# Altium PCB VTG-Ctrl.PcbDoc (part 1 of 2)
Units mm, origin at the board's own origin, x right, y up, seen from the top; angles counter-clockwise.
Board outline 101 x 82 mm, 12 copper layers (Top, Layer 1, Layer 2, Layer 3, Layer 4, Layer 5, Layer 6, Layer 7, Layer 8, Layer 9, Layer 10, Bottom), stack 1.92 mm thick; 171 components, 102 nets, 650 pads, 12 vias.
Unrouted connection lines stored in the file: 291.
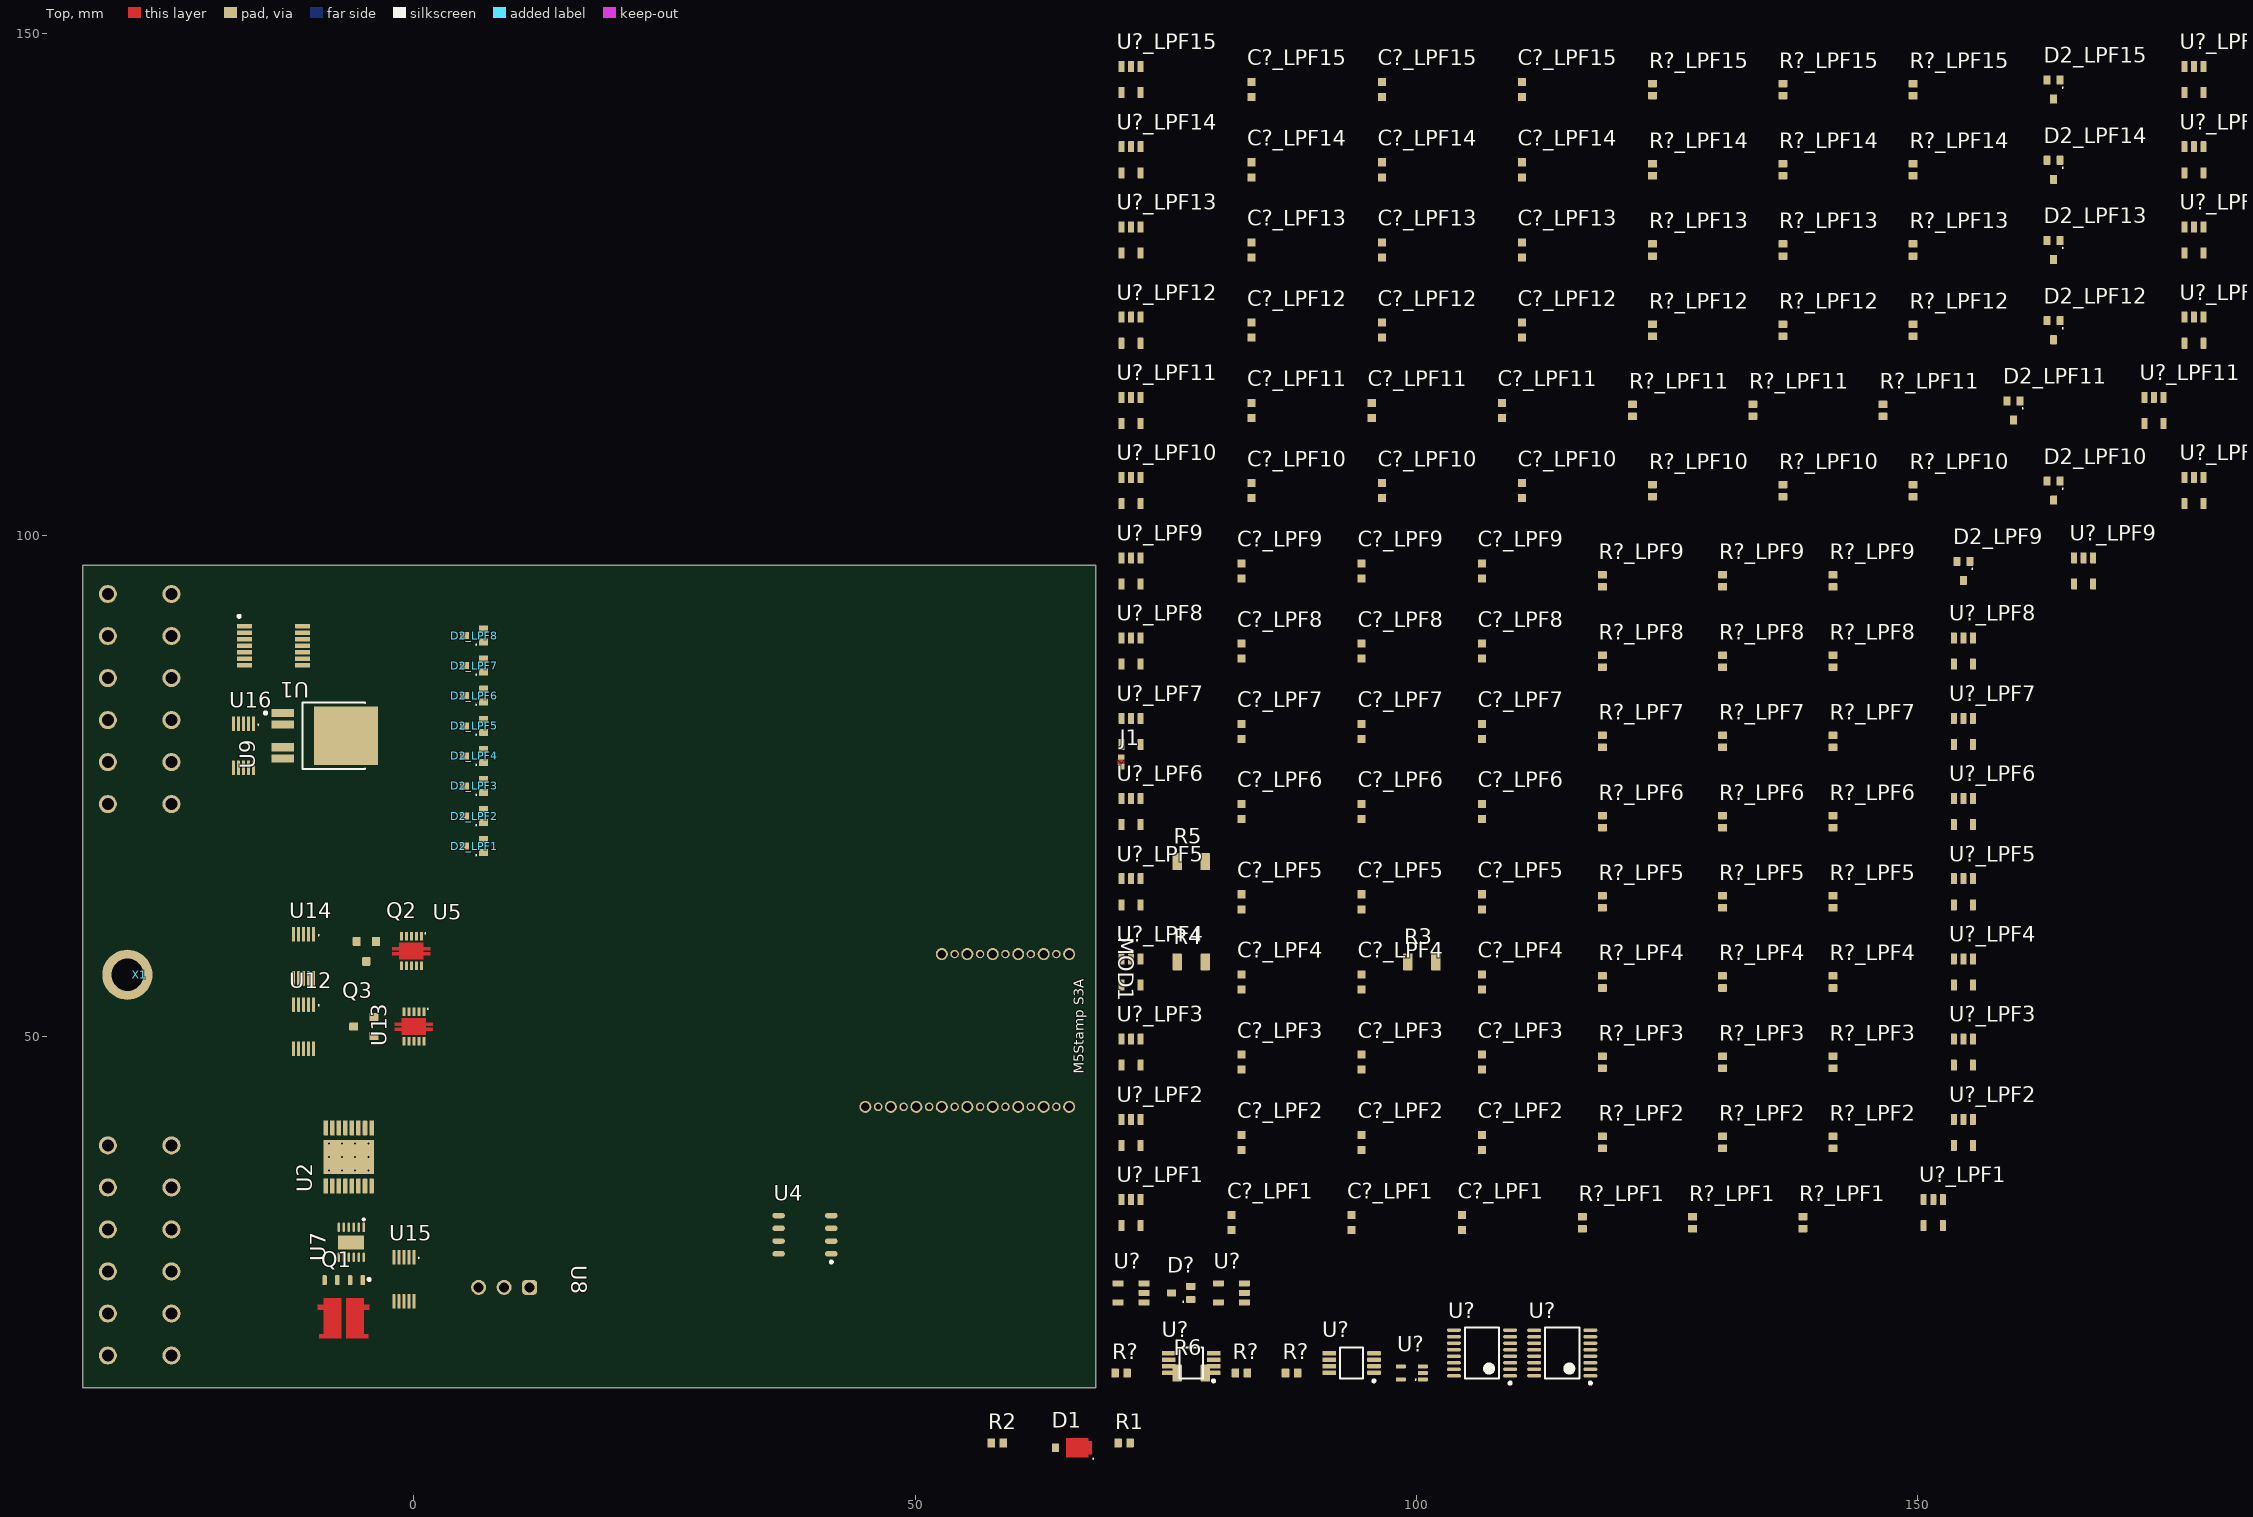
[diagram p0: Top view]
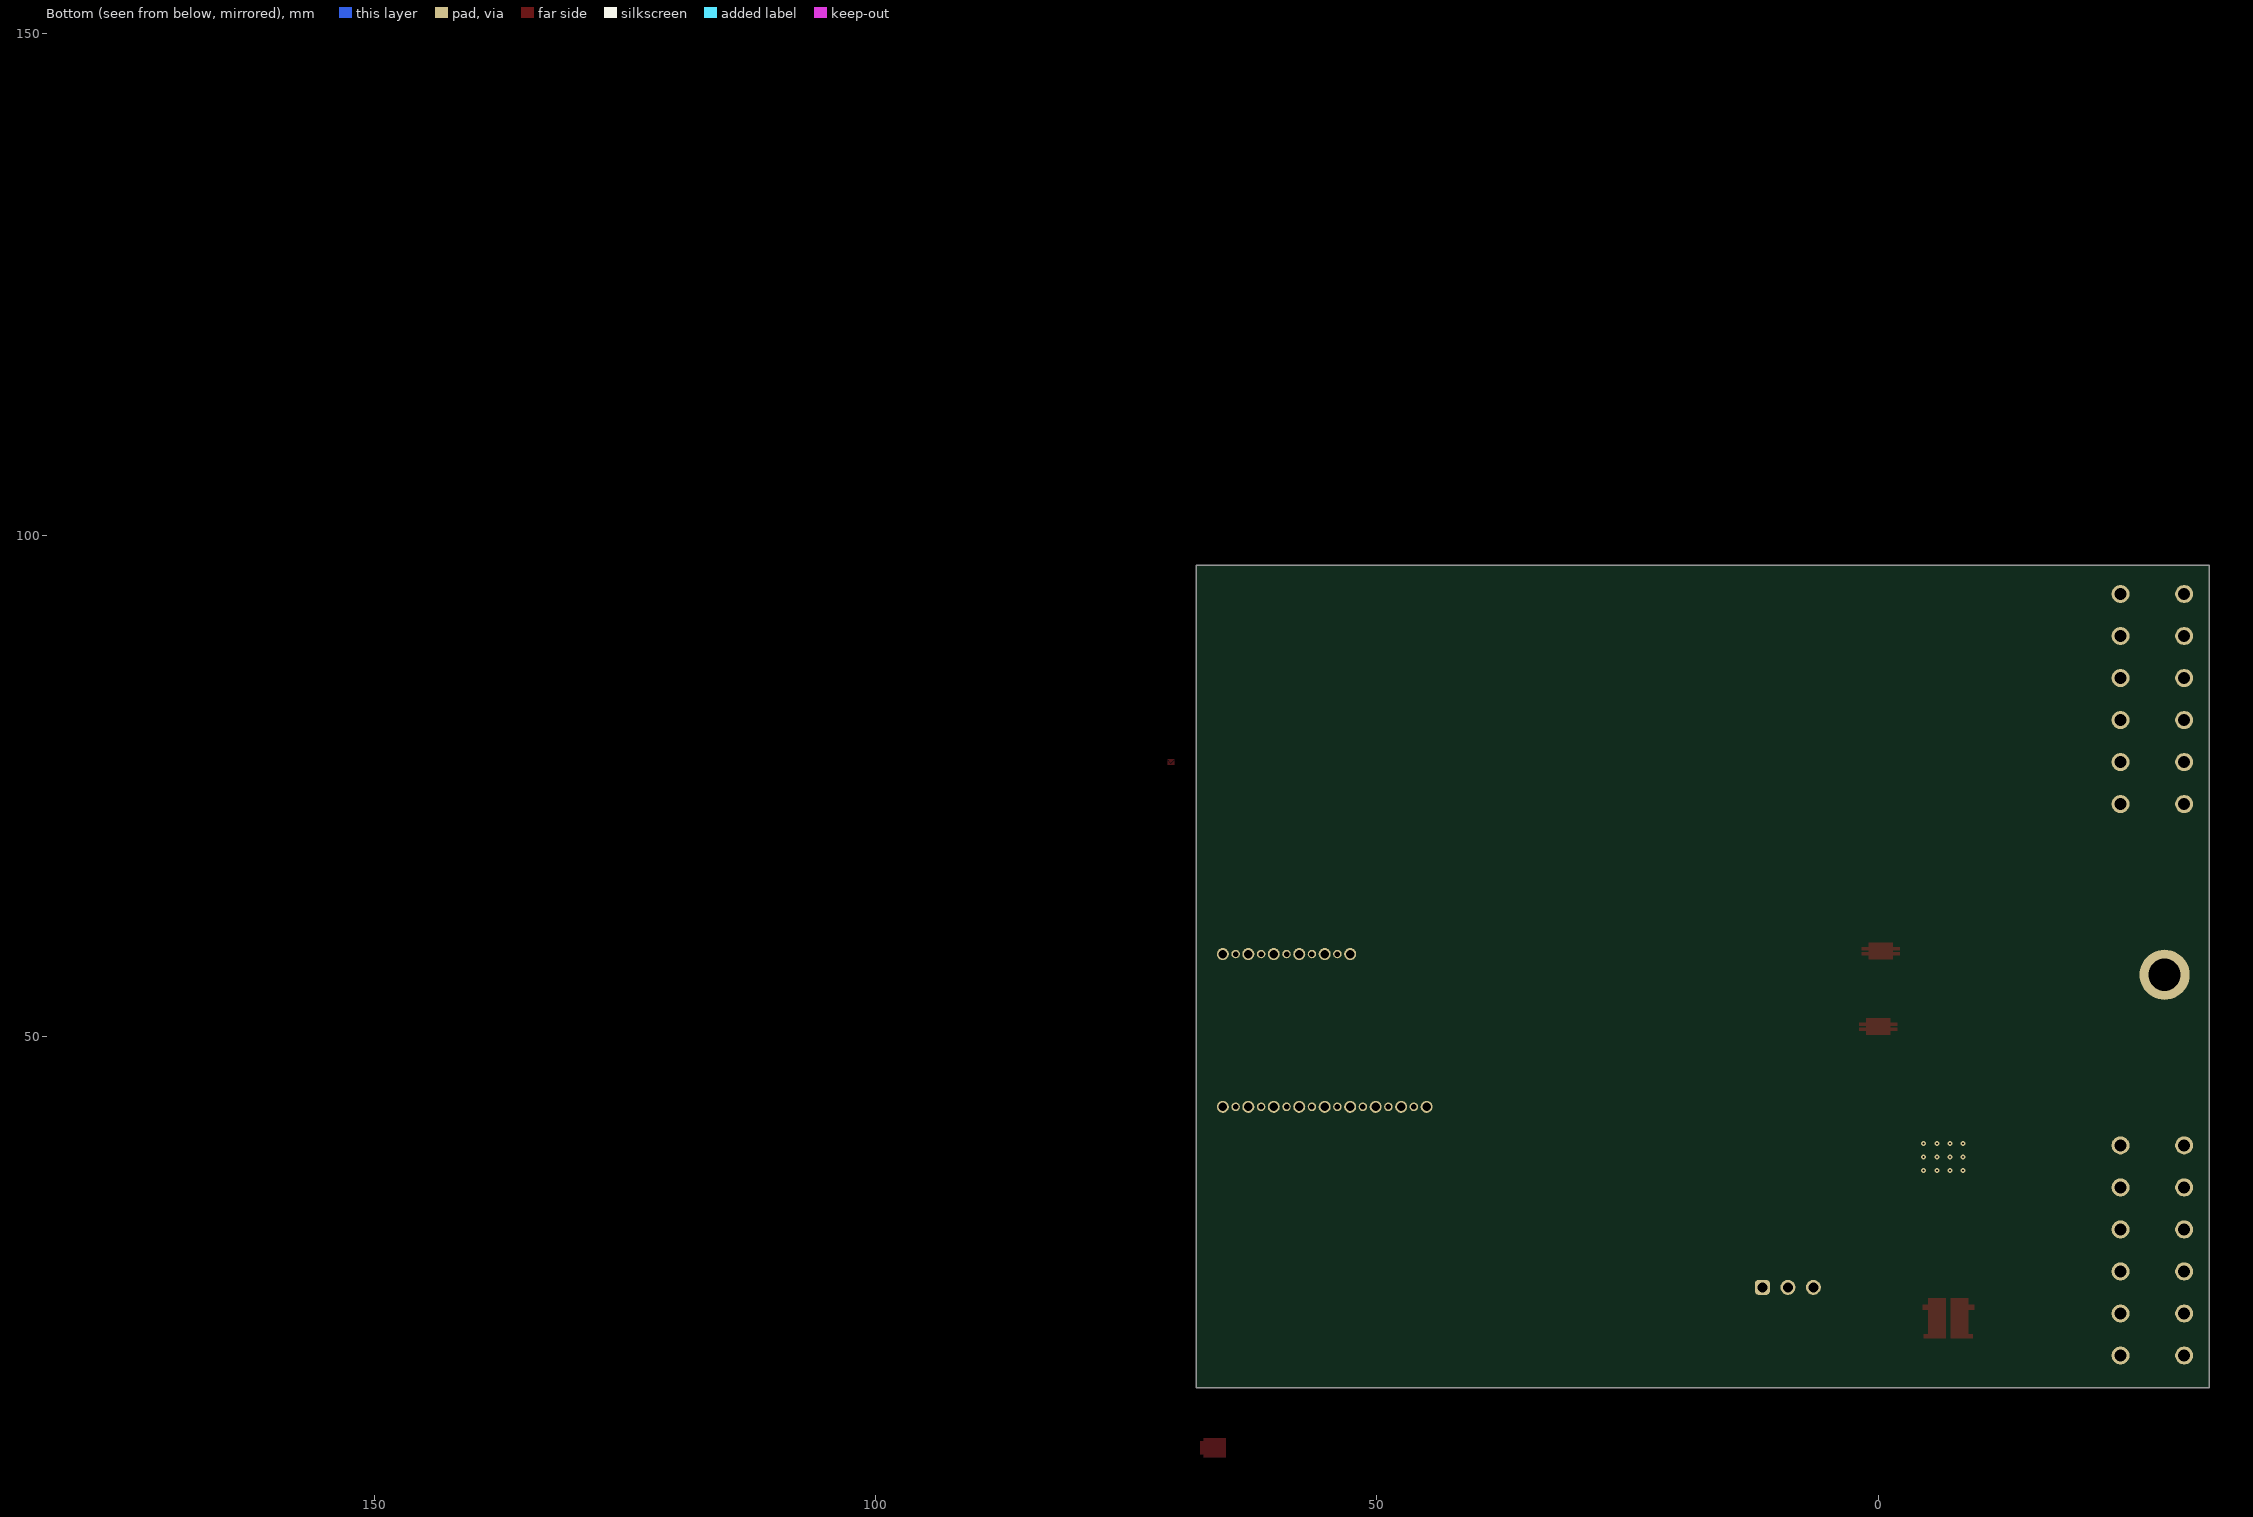
[diagram p1: Bottom view, seen from below]

## Layer stack, top to bottom
Top Solder: solder mask 0.015, WE-SM-0001, Dk 3.5
Top: signal copper 0.035
Dielectric 1: prepreg 0.125, WE-PP-0035, Dk 3.7
Layer 1: signal copper 0.035
Dielectric 2: core 0.15, WE-CO-0043, Dk 4.3
Layer 2: signal copper 0.035
Dielectric 3: prepreg 0.125, WE-PP-0035, Dk 3.7
Layer 3: signal copper 0.035
Dielectric 4: core 0.15, WE-CO-0043, Dk 4.3
Layer 4: signal copper 0.035
Dielectric 5: prepreg 0.125, WE-PP-0035, Dk 3.7
Layer 5: signal copper 0.035
Dielectric 6: core 0.15, WE-CO-0043, Dk 4.3
Layer 6: signal copper 0.035
Dielectric 7: prepreg 0.125, WE-PP-0035, Dk 3.7
Layer 7: signal copper 0.035
Dielectric 8: core 0.15, WE-CO-0043, Dk 4.3
Layer 8: signal copper 0.035
Dielectric 10: prepreg 0.125, WE-PP-0035, Dk 3.7
Layer 9: signal copper 0.035
Dielectric 9: core 0.15, WE-CO-0043, Dk 4.3
Layer 10: signal copper 0.035
Dielectric 11: prepreg 0.125, WE-PP-0035, Dk 3.7
Bottom: signal copper 0.035
Bottom Solder: solder mask 0.015, WE-SM-0001, Dk 3.5

## Board outline
-33,15 -33,97 68,97 68,15

## Design rules (kind name [scope] priority, off if disabled: settings)
BoardOutlineClearance [All] p1: gap=0.5 ignorepadtopadclearanceinfootprint=FALSE
Clearance [All] p1: gap=0.1 ignorepadtopadclearanceinfootprint=FALSE
ComponentClearance [NOT(HasFootprint('AFR_LOGO_SHORT_5X31_SILK') OR HasFootprint('SYMBOL_HV_10X10') OR HasFootprint('TRACKER_8X20_SILK')) vs NOT(HasFootprint('AFR_LOGO_SHORT_5X31_SILK') OR HasFootprint('SYMBOL_HV_10X10') OR HasFootprint('TRACKER_8X20_SILK'))] p1: gap=0.05 collisioncheckmode=3 verticalgap=0.254 showdistances=FALSE checkcomponentboundary=TRUE
DiffPairsRouting [All] p1: maxlimit=10 minlimit=0.1 mostfreqgap=0.15 toplayer_minwidth=0.125 toplayer_maxwidth=0.381 toplayer_prefwidth=0.254 midlayer1_minwidth=0.125 midlayer1_maxwidth=0.381 midlayer1_prefwidth=0.254 midlayer2_minwidth=0.125 midlayer2_maxwidth=0.381 midlayer2_prefwidth=0.254 midlayer3_minwidth=0.125 midlayer3_maxwidth=0.381 midlayer3_prefwidth=0.254 midlayer4_minwidth=0.125 midlayer4_maxwidth=0.381 midlayer4_prefwidth=0.254 midlayer5_minwidth=0.125 midlayer5_maxwidth=0.381 midlayer5_prefwidth=0.254 midlayer6_minwidth=0.125 midlayer6_maxwidth=0.381 midlayer6_prefwidth=0.254 midlayer7_minwidth=0.125 midlayer7_maxwidth=0.381 midlayer7_prefwidth=0.254 midlayer8_minwidth=0.125 midlayer8_maxwidth=0.381 midlayer8_prefwidth=0.254 midlayer9_minwidth=0.125 midlayer9_maxwidth=0.381 midlayer9_prefwidth=0.254 midlayer10_minwidth=0.125 midlayer10_maxwidth=0.381 midlayer10_prefwidth=0.254 bottomlayer_minwidth=0.125 bottomlayer_maxwidth=0.381 bottomlayer_prefwidth=0.254 maxuncoupledlength=12.7
FabricationTestPointUsage FabricationTestPointUsage_1 [All] p1: valid=0 allowmultiple=FALSE
FabricationTestpoint FabricationTestpoint_1 [All] p1: side=3 testpointundercomponent=TRUE minsize=1.016 maxsize=2.54 preferedsize=1.524 minholesize=0 maxholesize=1.016 preferedholesize=0.813 testpointgrid=0.025 allowsidetop=TRUE allowsidebottom=TRUE usegrid=TRUE gridtolerance=0
HoleSize [All] p1: absolutevalues=TRUE maxlimit=6 minlimit=0.2 maxpercent=80.000 minpercent=20.000
HoleSize FabricationTestpoint [All] p2 off: absolutevalues=TRUE maxlimit=2.54 minlimit=0.025 maxpercent=80.000 minpercent=20.000
HoleSize FabricationTestPointUsage [All] p3 off: absolutevalues=TRUE maxlimit=2.54 minlimit=0.025 maxpercent=80.000 minpercent=20.000
HoleToHoleClearance [All] p1: gap=0.3 allowstackedmicrovias=TRUE
MinimumSolderMaskSliver [All] p1: minsoldermaskwidth=0.07
PasteMaskExpansion [All] p1: expansion=-0.05 percent=-5.000000
PlaneClearance [All] p1: clearance=0.5
PlaneConnect [All] p1: planeconnectstyle=Relief reliefexpansion=0.4 reliefentries=4 reliefconductorwidth=0.15 reliefairgap=0.15
PolygonConnect [All] p1: thpad.connectstyle=Relief thpad.reliefconductorwidth=0.254 thpad.reliefentries=4 thpad.polygonreliefangle="45 Angle" thpad.airgapwidth=0.254 smdpad.connectstyle=Relief smdpad.reliefconductorwidth=0.254 smdpad.reliefentries=4 smdpad.polygonreliefangle="45 Angle" smdpad.airgapwidth=0.254 via.connectstyle=Direct via.reliefconductorwidth=0.254 via.reliefentries=4 via.polygonreliefangle="45 Angle" via.airgapwidth=0.254
RoutingCorners [All] p1: cornerstyle=45-Degree minsetback=1.25 maxsetback=1.25
RoutingVias [All] p1: holewidth=0.2 width=0.55 viastyle="Through Hole" minholewidth=0.2 minwidth=0.5 maxholewidth=0.45 maxwidth=0.75
SilkToSilkClearance [All] p1: silktosilkclearance=0.2
SilkToSolderMaskClearance [IsPad] p1: minsilkscreentomaskgap=0.3 clearancetoexposedcopper=TRUE
SolderMaskExpansion [All] p1: expansion=0.05 istentingtop=FALSE
SupplyNets "Schematic Supply Nets_2" [InNet('AGND')] p1: voltage=0.000
SupplyNets "Schematic Supply Nets_1" [InNet('REF4096')] p2: voltage=0.000
SupplyNets "Schematic Supply Nets" [InNet('+5V')] p3: voltage=0.000
SupplyNets "Schematic Supply Nets_10" [InNet('3V3')] p4: voltage=0.000
SupplyNets "Schematic Supply Nets_9" [InNet('Ub')] p5: voltage=0.000
SupplyNets "Schematic Supply Nets_8" [InNet('12V')] p6: voltage=0.000
SupplyNets "Schematic Supply Nets_7" [InNet('5V')] p7: voltage=0.000
SupplyNets "Schematic Supply Nets_6" [InNet('GND')] p8: voltage=0.000
UnRoutedNet [All] p1: checkbadconnections=TRUE
Width [All] p1: maxlimit=10 minlimit=0.06 preferedwidth=0.25
16 further rules are at their usual default settings.

## Classes and differential pairs
net class AIN[0..14]: AIN0 AIN1 AIN2 AIN3 AIN4 AIN5 AIN6 AIN7 AIN8 AIN9 AIN10 AIN11 AIN12 AIN13 AIN14
component class LPF15: C?_LPF15 D2_LPF15 R?_LPF15 U?_LPF15
component class LPF14: C?_LPF14 D2_LPF14 R?_LPF14 U?_LPF14
component class LPF13: C?_LPF13 D2_LPF13 R?_LPF13 U?_LPF13
component class LPF12: C?_LPF12 D2_LPF12 R?_LPF12 U?_LPF12
component class LPF11: C?_LPF11 D2_LPF11 R?_LPF11 U?_LPF11
component class LPF10: C?_LPF10 D2_LPF10 R?_LPF10 U?_LPF10
component class LPF9: C?_LPF9 D2_LPF9 R?_LPF9 U?_LPF9
component class fturbo_cond: D? U?
component class VTG-Ctrl: J1
component class EF5: Q2 Q3 R3 R4 U5 U12 U13 U14
component class LPF8: C?_LPF8 D2_LPF8 R?_LPF8 U?_LPF8
component class LPF7: C?_LPF7 D2_LPF7 R?_LPF7 U?_LPF7
component class LPF6: C?_LPF6 D2_LPF6 R?_LPF6 U?_LPF6
component class LPF5: C?_LPF5 D2_LPF5 R?_LPF5 U?_LPF5
component class LPF4: C?_LPF4 D2_LPF4 R?_LPF4 U?_LPF4
component class LPF3: C?_LPF3 D2_LPF3 R?_LPF3 U?_LPF3
component class LPF2: C?_LPF2 D2_LPF2 R?_LPF2 U?_LPF2
component class LPF1: C?_LPF1 D2_LPF1 R?_LPF1 U?_LPF1
channel class LPF: LPF1 LPF2 LPF3 LPF4 LPF5 LPF6 LPF7 LPF8 LPF9 LPF10 LPF11 LPF12 LPF13 LPF14 LPF15
net class SPI.CS[1..3]: SPI.CS1 SPI.CS2 SPI.CS3
net class ADCIN[0..14]: ADCIN0 ADCIN1 ADCIN2 ADCIN4 ADCIN5 ADCIN6 ADCIN7 ADCIN8 ADCIN9 ADCIN10 ADCIN11 ADCIN12 ADCIN13 ADCIN14 AIN3
component class Designator: X1
component class TC: U1
component class LM78k: Q1 R5 U7 U15
component class DRV: U2
component class Designator: D1 R1 R2 R6 U9 U16
component class ADC: R? U?

## Components (designator, comment, footprint, x,y, rotation, side; value= is the part's Value field where it differs from the comment)
C?_LPF1 "885012206067" WCAP-CSGP_0603_L1.6W0.8H0.8_Reflow 81.525,31.45 r270 top value=22nF (schematic designator C?)
C?_LPF1 "885012206067" WCAP-CSGP_0603_L1.6W0.8H0.8_Reflow 93.525,31.45 r270 top value=22nF (schematic designator C?)
C?_LPF1 "885012206065" WCAP-CSGP_0603_L1.6W0.8H0.8_Reflow 104.525,31.45 r270 top value=10nF (schematic designator C?)
C?_LPF2 "885012206067" WCAP-CSGP_0603_L1.6W0.8H0.8_Reflow 82.525,39.45 r270 top value=22nF (schematic designator C?)
C?_LPF2 "885012206067" WCAP-CSGP_0603_L1.6W0.8H0.8_Reflow 94.525,39.45 r270 top value=22nF (schematic designator C?)
C?_LPF2 "885012206065" WCAP-CSGP_0603_L1.6W0.8H0.8_Reflow 106.525,39.45 r270 top value=10nF (schematic designator C?)
C?_LPF3 "885012206067" WCAP-CSGP_0603_L1.6W0.8H0.8_Reflow 82.525,47.45 r270 top value=22nF (schematic designator C?)
C?_LPF3 "885012206067" WCAP-CSGP_0603_L1.6W0.8H0.8_Reflow 94.525,47.45 r270 top value=22nF (schematic designator C?)
C?_LPF3 "885012206065" WCAP-CSGP_0603_L1.6W0.8H0.8_Reflow 106.525,47.45 r270 top value=10nF (schematic designator C?)
C?_LPF4 "885012206067" WCAP-CSGP_0603_L1.6W0.8H0.8_Reflow 94.525,55.45 r270 top value=22nF (schematic designator C?)
C?_LPF4 "885012206067" WCAP-CSGP_0603_L1.6W0.8H0.8_Reflow 82.525,55.45 r270 top value=22nF (schematic designator C?)
C?_LPF4 "885012206065" WCAP-CSGP_0603_L1.6W0.8H0.8_Reflow 106.525,55.45 r270 top value=10nF (schematic designator C?)
C?_LPF5 "885012206067" WCAP-CSGP_0603_L1.6W0.8H0.8_Reflow 82.525,63.45 r270 top value=22nF (schematic designator C?)
C?_LPF5 "885012206067" WCAP-CSGP_0603_L1.6W0.8H0.8_Reflow 94.525,63.45 r270 top value=22nF (schematic designator C?)
C?_LPF5 "885012206065" WCAP-CSGP_0603_L1.6W0.8H0.8_Reflow 106.525,63.45 r270 top value=10nF (schematic designator C?)
C?_LPF6 "885012206065" WCAP-CSGP_0603_L1.6W0.8H0.8_Reflow 106.525,72.45 r270 top value=10nF (schematic designator C?)
C?_LPF6 "885012206067" WCAP-CSGP_0603_L1.6W0.8H0.8_Reflow 94.525,72.45 r270 top value=22nF (schematic designator C?)
C?_LPF6 "885012206067" WCAP-CSGP_0603_L1.6W0.8H0.8_Reflow 82.525,72.45 r270 top value=22nF (schematic designator C?)
C?_LPF7 "885012206067" WCAP-CSGP_0603_L1.6W0.8H0.8_Reflow 82.525,80.45 r270 top value=22nF (schematic designator C?)
C?_LPF7 "885012206067" WCAP-CSGP_0603_L1.6W0.8H0.8_Reflow 94.525,80.45 r270 top value=22nF (schematic designator C?)
C?_LPF7 "885012206065" WCAP-CSGP_0603_L1.6W0.8H0.8_Reflow 106.525,80.45 r270 top value=10nF (schematic designator C?)
C?_LPF8 "885012206067" WCAP-CSGP_0603_L1.6W0.8H0.8_Reflow 94.525,88.45 r270 top value=22nF (schematic designator C?)
C?_LPF8 "885012206067" WCAP-CSGP_0603_L1.6W0.8H0.8_Reflow 82.525,88.45 r270 top value=22nF (schematic designator C?)
C?_LPF8 "885012206065" WCAP-CSGP_0603_L1.6W0.8H0.8_Reflow 106.525,88.45 r270 top value=10nF (schematic designator C?)
C?_LPF9 "885012206065" WCAP-CSGP_0603_L1.6W0.8H0.8_Reflow 106.525,96.45 r270 top value=10nF (schematic designator C?)
C?_LPF9 "885012206067" WCAP-CSGP_0603_L1.6W0.8H0.8_Reflow 94.525,96.45 r270 top value=22nF (schematic designator C?)
C?_LPF9 "885012206067" WCAP-CSGP_0603_L1.6W0.8H0.8_Reflow 82.525,96.45 r270 top value=22nF (schematic designator C?)
C?_LPF10 "885012206067" WCAP-CSGP_0603_L1.6W0.8H0.8_Reflow 83.525,104.45 r270 top value=22nF (schematic designator C?)
C?_LPF10 "885012206067" WCAP-CSGP_0603_L1.6W0.8H0.8_Reflow 96.525,104.45 r270 top value=22nF (schematic designator C?)
C?_LPF10 "885012206065" WCAP-CSGP_0603_L1.6W0.8H0.8_Reflow 110.525,104.45 r270 top value=10nF (schematic designator C?)
C?_LPF11 "885012206067" WCAP-CSGP_0603_L1.6W0.8H0.8_Reflow 95.525,112.45 r270 top value=22nF (schematic designator C?)
C?_LPF11 "885012206067" WCAP-CSGP_0603_L1.6W0.8H0.8_Reflow 83.525,112.45 r270 top value=22nF (schematic designator C?)
C?_LPF11 "885012206065" WCAP-CSGP_0603_L1.6W0.8H0.8_Reflow 108.525,112.45 r270 top value=10nF (schematic designator C?)
C?_LPF12 "885012206065" WCAP-CSGP_0603_L1.6W0.8H0.8_Reflow 110.525,120.45 r270 top value=10nF (schematic designator C?)
C?_LPF12 "885012206067" WCAP-CSGP_0603_L1.6W0.8H0.8_Reflow 96.525,120.45 r270 top value=22nF (schematic designator C?)
C?_LPF12 "885012206067" WCAP-CSGP_0603_L1.6W0.8H0.8_Reflow 83.525,120.45 r270 top value=22nF (schematic designator C?)
C?_LPF13 "885012206067" WCAP-CSGP_0603_L1.6W0.8H0.8_Reflow 83.525,128.45 r270 top value=22nF (schematic designator C?)
C?_LPF13 "885012206067" WCAP-CSGP_0603_L1.6W0.8H0.8_Reflow 96.525,128.45 r270 top value=22nF (schematic designator C?)
C?_LPF13 "885012206065" WCAP-CSGP_0603_L1.6W0.8H0.8_Reflow 110.525,128.45 r270 top value=10nF (schematic designator C?)
C?_LPF14 "885012206067" WCAP-CSGP_0603_L1.6W0.8H0.8_Reflow 96.525,136.45 r270 top value=22nF (schematic designator C?)
C?_LPF14 "885012206067" WCAP-CSGP_0603_L1.6W0.8H0.8_Reflow 83.525,136.45 r270 top value=22nF (schematic designator C?)
C?_LPF14 "885012206065" WCAP-CSGP_0603_L1.6W0.8H0.8_Reflow 110.525,136.45 r270 top value=10nF (schematic designator C?)
C?_LPF15 "885012206067" WCAP-CSGP_0603_L1.6W0.8H0.8_Reflow 96.525,144.45 r270 top value=22nF (schematic designator C?)
C?_LPF15 "885012206067" WCAP-CSGP_0603_L1.6W0.8H0.8_Reflow 83.525,144.45 r270 top value=22nF (schematic designator C?)
C?_LPF15 "885012206065" WCAP-CSGP_0603_L1.6W0.8H0.8_Reflow 110.525,144.45 r270 top value=10nF (schematic designator C?)
D1 "V5NM63HM3" DFN3820A 65.63,9 r180 top
D2_LPF1 "BAT54SWT1G" ONSC-SOT-323-3-Generic 6,69 r180 top (schematic designator D2)
D2_LPF2 "BAT54SWT1G" ONSC-SOT-323-3-Generic 6,72 r180 top (schematic designator D2)
D2_LPF3 "BAT54SWT1G" ONSC-SOT-323-3-Generic 6,75 r180 top (schematic designator D2)
D2_LPF4 "BAT54SWT1G" ONSC-SOT-323-3-Generic 6,78 r180 top (schematic designator D2)
D2_LPF5 "BAT54SWT1G" ONSC-SOT-323-3-Generic 6,81 r180 top (schematic designator D2)
D2_LPF6 "BAT54SWT1G" ONSC-SOT-323-3-Generic 6,84 r180 top (schematic designator D2)
D2_LPF7 "BAT54SWT1G" ONSC-SOT-323-3-Generic 6,87 r180 top (schematic designator D2)
D2_LPF8 "BAT54SWT1G" ONSC-SOT-323-3-Generic 6,90 r180 top (schematic designator D2)
D2_LPF9 "BAT54SWT1G" ONSC-SOT-323-3-Generic 154.525,96.45 r270 top (schematic designator D2)
D2_LPF10 "BAT54SWT1G" ONSC-SOT-323-3-Generic 163.525,104.45 r270 top (schematic designator D2)
D2_LPF11 "BAT54SWT1G" ONSC-SOT-323-3-Generic 159.525,112.45 r270 top (schematic designator D2)
D2_LPF12 "BAT54SWT1G" ONSC-SOT-323-3-Generic 163.525,120.45 r270 top (schematic designator D2)
D2_LPF13 "BAT54SWT1G" ONSC-SOT-323-3-Generic 163.525,128.45 r270 top (schematic designator D2)
D2_LPF14 "BAT54SWT1G" ONSC-SOT-323-3-Generic 163.525,136.45 r270 top (schematic designator D2)
D2_LPF15 "BAT54SWT1G" ONSC-SOT-323-3-Generic 163.525,144.45 r270 top (schematic designator D2)
D? "BAT54SWT1G" ONSC-SOT-323-3-Generic 76.525,24.45 r180 top
J1 "JUMPER" JUMPER 70.525,77.45 r180 top
MOD1 "M5Stamp S3A" "M5Stamp S3A-mfg" 56.46,50.62 r90 top
Q1 "SQJ974EP-T1_GE3" FP-C21-1498-DUAL-MFG -7,23 r180 top
Q2 "DMG2302UK-7" SOT23-3-DIODES -4.75,58.5 r270 top
Q3 "DMG2302UK-7" SOT23-3-DIODES -5,51 r180 top
R1 "ERJ-3EKF1002V" SMD_0603_RES 70.826,9.478 r180 top value=10k
R2 "ERJ-3EKF1002V" SMD_0603_RES 58.176,9.478 r180 top value=10k
R3 "ERJ-8BWFR050V" SMD_1206_RES 100.525,57.45 r180 top value=50m
R4 "ERJ-8BWFR050V" SMD_1206_RES 77.525,57.45 r180 top value=50m
R5 "ERJ-8BWFR010V" SMD_1206_RES 77.525,67.45 r180 top value=10m
R6 "ERJ-8BWFR010V" SMD_1206_RES 77.525,16.45 r180 top value=10m
R? "ERJ-3EKF1002V" SMD_0603_RES 70.525,16.45 r180 top value=10k
R? "ERJ-3EKF1002V" SMD_0603_RES 87.525,16.45 r180 top value=10k
R? "ERJ-3EKF1002V" SMD_0603_RES 82.525,16.45 r180 top value=10k
R?_LPF1 "ERJ-3EKF4702V" SMD_0603_RES 138.525,31.45 r270 top value=47k (schematic designator R?)
R?_LPF1 "ERJ-3EKF4702V" SMD_0603_RES 127.525,31.45 r270 top value=47k (schematic designator R?)
R?_LPF1 "ERJ-3EKF1002V" SMD_0603_RES 116.525,31.45 r270 top value=10k (schematic designator R?)
R?_LPF2 "ERJ-3EKF1002V" SMD_0603_RES 118.525,39.45 r270 top value=10k (schematic designator R?)
R?_LPF2 "ERJ-3EKF4702V" SMD_0603_RES 141.525,39.45 r270 top value=47k (schematic designator R?)
R?_LPF2 "ERJ-3EKF4702V" SMD_0603_RES 130.525,39.45 r270 top value=47k (schematic designator R?)
R?_LPF3 "ERJ-3EKF4702V" SMD_0603_RES 141.525,47.45 r270 top value=47k (schematic designator R?)
R?_LPF3 "ERJ-3EKF4702V" SMD_0603_RES 130.525,47.45 r270 top value=47k (schematic designator R?)
R?_LPF3 "ERJ-3EKF1002V" SMD_0603_RES 118.525,47.45 r270 top value=10k (schematic designator R?)
R?_LPF4 "ERJ-3EKF4702V" SMD_0603_RES 130.525,55.45 r270 top value=47k (schematic designator R?)
R?_LPF4 "ERJ-3EKF4702V" SMD_0603_RES 141.525,55.45 r270 top value=47k (schematic designator R?)
R?_LPF4 "ERJ-3EKF1002V" SMD_0603_RES 118.525,55.45 r270 top value=10k (schematic designator R?)
R?_LPF5 "ERJ-3EKF4702V" SMD_0603_RES 130.525,63.45 r270 top value=47k (schematic designator R?)
R?_LPF5 "ERJ-3EKF1002V" SMD_0603_RES 118.525,63.45 r270 top value=10k (schematic designator R?)
R?_LPF5 "ERJ-3EKF4702V" SMD_0603_RES 141.525,63.45 r270 top value=47k (schematic designator R?)
R?_LPF6 "ERJ-3EKF4702V" SMD_0603_RES 141.525,71.45 r270 top value=47k (schematic designator R?)
R?_LPF6 "ERJ-3EKF4702V" SMD_0603_RES 130.525,71.45 r270 top value=47k (schematic designator R?)
R?_LPF6 "ERJ-3EKF1002V" SMD_0603_RES 118.525,71.45 r270 top value=10k (schematic designator R?)
R?_LPF7 "ERJ-3EKF4702V" SMD_0603_RES 141.525,79.45 r270 top value=47k (schematic designator R?)
R?_LPF7 "ERJ-3EKF4702V" SMD_0603_RES 130.525,79.45 r270 top value=47k (schematic designator R?)
R?_LPF7 "ERJ-3EKF1002V" SMD_0603_RES 118.525,79.45 r270 top value=10k (schematic designator R?)
R?_LPF8 "ERJ-3EKF1002V" SMD_0603_RES 118.525,87.45 r270 top value=10k (schematic designator R?)
R?_LPF8 "ERJ-3EKF4702V" SMD_0603_RES 130.525,87.45 r270 top value=47k (schematic designator R?)
R?_LPF8 "ERJ-3EKF4702V" SMD_0603_RES 141.525,87.45 r270 top value=47k (schematic designator R?)
R?_LPF9 "ERJ-3EKF4702V" SMD_0603_RES 141.525,95.45 r270 top value=47k (schematic designator R?)
R?_LPF9 "ERJ-3EKF4702V" SMD_0603_RES 130.525,95.45 r270 top value=47k (schematic designator R?)
R?_LPF9 "ERJ-3EKF1002V" SMD_0603_RES 118.525,95.45 r270 top value=10k (schematic designator R?)
R?_LPF10 "ERJ-3EKF4702V" SMD_0603_RES 136.525,104.45 r270 top value=47k (schematic designator R?)
R?_LPF10 "ERJ-3EKF4702V" SMD_0603_RES 149.525,104.45 r270 top value=47k (schematic designator R?)
R?_LPF10 "ERJ-3EKF1002V" SMD_0603_RES 123.525,104.45 r270 top value=10k (schematic designator R?)
R?_LPF11 "ERJ-3EKF1002V" SMD_0603_RES 121.525,112.45 r270 top value=10k (schematic designator R?)
R?_LPF11 "ERJ-3EKF4702V" SMD_0603_RES 146.525,112.45 r270 top value=47k (schematic designator R?)
R?_LPF11 "ERJ-3EKF4702V" SMD_0603_RES 133.525,112.45 r270 top value=47k (schematic designator R?)
R?_LPF12 "ERJ-3EKF4702V" SMD_0603_RES 149.525,120.45 r270 top value=47k (schematic designator R?)
R?_LPF12 "ERJ-3EKF4702V" SMD_0603_RES 136.525,120.45 r270 top value=47k (schematic designator R?)
R?_LPF12 "ERJ-3EKF1002V" SMD_0603_RES 123.525,120.45 r270 top value=10k (schematic designator R?)
R?_LPF13 "ERJ-3EKF4702V" SMD_0603_RES 149.525,128.45 r270 top value=47k (schematic designator R?)
R?_LPF13 "ERJ-3EKF4702V" SMD_0603_RES 136.525,128.45 r270 top value=47k (schematic designator R?)
R?_LPF13 "ERJ-3EKF1002V" SMD_0603_RES 123.525,128.45 r270 top value=10k (schematic designator R?)
R?_LPF14 "ERJ-3EKF4702V" SMD_0603_RES 149.525,136.45 r270 top value=47k (schematic designator R?)
R?_LPF14 "ERJ-3EKF4702V" SMD_0603_RES 136.525,136.45 r270 top value=47k (schematic designator R?)
R?_LPF14 "ERJ-3EKF1002V" SMD_0603_RES 123.525,136.45 r270 top value=10k (schematic designator R?)
R?_LPF15 "ERJ-3EKF4702V" SMD_0603_RES 136.525,144.45 r270 top value=47k (schematic designator R?)
R?_LPF15 "ERJ-3EKF1002V" SMD_0603_RES 123.525,144.45 r270 top value=10k (schematic designator R?)
R?_LPF15 "ERJ-3EKF4702V" SMD_0603_RES 149.525,144.45 r270 top value=47k (schematic designator R?)
U1 "MAX31856MUD+T" "TSSOP - 14" -14,89 r0 top
U2 "DRV8874PWPR" FP-PWP0016J-MFG -6.5,38 r270 top
U4 "TJA1051T/3,118" NXP-SOIC-8_L 39,30.25 r180 top
U5 "TCKE805NL,RF" WSON10B-Toshiba -0.25,58.525 r270 top
U7 "LM74800QDRRRQ1" FP-DRR0012E-IPC_B -6.25,29.491 r270 top
U8 "173010535" WPME-FDSM_SIP-3_L11.6W8H10.4 9,23.3 r180 top
U9 "BTS452RAKSA1" FP-PG-TO252-5-MFG -8,80 r270 top
U12 "INA226AQDGSRQ1" TI-DGS0010A-VSSOP-10 -11,51 r270 top
U13 "TCKE805NL,RF" WSON10B-Toshiba 0,51 r270 top
U14 "INA226AQDGSRQ1" TI-DGS0010A-VSSOP-10 -11,58 r270 top
U15 "INA226AQDGSRQ1" TI-DGS0010A-VSSOP-10 -1,25.8 r270 top
U16 "INA226AQDGSRQ1" TI-DGS0010A-VSSOP-10 -17,79 r270 top
U? "REF5040AIDGKT" DGK0008A_N 93.525,17.45 r180 top
U? "ADC128S052QCMT/NOPB" TI-PW16_L 106.525,18.45 r180 top
U? "ADC128S052QCMT/NOPB" TI-PW16_L 114.525,18.45 r180 top
U? "TLV9001QDCKRQ1" FP-DCK0005A-MFG 99.525,16.45 r180 top
U? "SN74LVC1G17DBVR" TI-SOT23-5_DBV0005A 81.525,24.45 r180 top
U? "REF5040AIDGKT" DGK0008A_N 77.525,17.45 r180 top
U? "SN74LVC1G17DBVR" TI-SOT23-5_DBV0005A 71.525,24.45 r180 top
U?_LPF1 "RS8551XF-Q1" TI-SOT23-5_DBV0005A 71.525,32.45 r270 top (schematic designator U?)
U?_LPF1 "RS8551XF-Q1" TI-SOT23-5_DBV0005A 151.525,32.45 r270 top (schematic designator U?)
U?_LPF2 "RS8551XF-Q1" TI-SOT23-5_DBV0005A 71.525,40.45 r270 top (schematic designator U?)
U?_LPF2 "RS8551XF-Q1" TI-SOT23-5_DBV0005A 154.525,40.45 r270 top (schematic designator U?)
U?_LPF3 "RS8551XF-Q1" TI-SOT23-5_DBV0005A 71.525,48.45 r270 top (schematic designator U?)
U?_LPF3 "RS8551XF-Q1" TI-SOT23-5_DBV0005A 154.525,48.45 r270 top (schematic designator U?)
U?_LPF4 "RS8551XF-Q1" TI-SOT23-5_DBV0005A 154.525,56.45 r270 top (schematic designator U?)
U?_LPF4 "RS8551XF-Q1" TI-SOT23-5_DBV0005A 71.525,56.45 r270 top (schematic designator U?)
U?_LPF5 "RS8551XF-Q1" TI-SOT23-5_DBV0005A 154.525,64.45 r270 top (schematic designator U?)
U?_LPF5 "RS8551XF-Q1" TI-SOT23-5_DBV0005A 71.525,64.45 r270 top (schematic designator U?)
U?_LPF6 "RS8551XF-Q1" TI-SOT23-5_DBV0005A 154.525,72.45 r270 top (schematic designator U?)
U?_LPF6 "RS8551XF-Q1" TI-SOT23-5_DBV0005A 71.525,72.45 r270 top (schematic designator U?)
U?_LPF7 "RS8551XF-Q1" TI-SOT23-5_DBV0005A 154.525,80.45 r270 top (schematic designator U?)
U?_LPF7 "RS8551XF-Q1" TI-SOT23-5_DBV0005A 71.525,80.45 r270 top (schematic designator U?)
U?_LPF8 "RS8551XF-Q1" TI-SOT23-5_DBV0005A 71.525,88.45 r270 top (schematic designator U?)
U?_LPF8 "RS8551XF-Q1" TI-SOT23-5_DBV0005A 154.525,88.45 r270 top (schematic designator U?)
U?_LPF9 "RS8551XF-Q1" TI-SOT23-5_DBV0005A 71.525,96.45 r270 top (schematic designator U?)
U?_LPF9 "RS8551XF-Q1" TI-SOT23-5_DBV0005A 166.525,96.45 r270 top (schematic designator U?)
U?_LPF10 "RS8551XF-Q1" TI-SOT23-5_DBV0005A 177.525,104.45 r270 top (schematic designator U?)
U?_LPF10 "RS8551XF-Q1" TI-SOT23-5_DBV0005A 71.525,104.45 r270 top (schematic designator U?)
U?_LPF11 "RS8551XF-Q1" TI-SOT23-5_DBV0005A 71.525,112.45 r270 top (schematic designator U?)
U?_LPF11 "RS8551XF-Q1" TI-SOT23-5_DBV0005A 173.525,112.45 r270 top (schematic designator U?)
U?_LPF12 "RS8551XF-Q1" TI-SOT23-5_DBV0005A 71.525,120.45 r270 top (schematic designator U?)
U?_LPF12 "RS8551XF-Q1" TI-SOT23-5_DBV0005A 177.525,120.45 r270 top (schematic designator U?)
U?_LPF13 "RS8551XF-Q1" TI-SOT23-5_DBV0005A 71.525,129.45 r270 top (schematic designator U?)
U?_LPF13 "RS8551XF-Q1" TI-SOT23-5_DBV0005A 177.525,129.45 r270 top (schematic designator U?)
U?_LPF14 "RS8551XF-Q1" TI-SOT23-5_DBV0005A 71.525,137.45 r270 top (schematic designator U?)
U?_LPF14 "RS8551XF-Q1" TI-SOT23-5_DBV0005A 177.525,137.45 r270 top (schematic designator U?)
U?_LPF15 "RS8551XF-Q1" TI-SOT23-5_DBV0005A 177.525,145.45 r270 top (schematic designator U?)
U?_LPF15 "RS8551XF-Q1" TI-SOT23-5_DBV0005A 71.525,145.45 r270 top (schematic designator U?)
X1 "DTM13.24P" DTM13-24P -28.569,56.173 r270 top

## Footprints (in the part's own frame and the unit in brackets; to place one, negate y for a bottom-side part, rotate by r counter-clockwise, add the part's x,y. Pads: shape width x height; smd on the part's side, far side on the other; paste and mask are expansions set on the pad)
DFN3820A [mm] "Vishay - DFN3820A - 3.85x2.08x1"
  round 0.025 smd: 1(-1.335,0)
  rrect15% 0.7x0.86 smd: 2(1.63,0)
  silkscreen extent -2.15,1.05 -2.05,1.15, body extent -2.05,-1.09 2.07,1.09, height 1
DGK0008A_N [mm] "TSOP, 8-Leads, Body 3.1x3.1mm, Pitch 0.65mm, IPC Medium Density"
  rrect22% 1.35x0.45 smd: 1(-2.225,0.975) 2(-2.225,0.325) 3(-2.225,-0.325) 4(-2.225,-0.975) 5(2.225,-0.975) 6(2.225,-0.325) 7(2.225,0.325) 8(2.225,0.975)
  silkscreen extent -2.35,-1.55 1.15,1.9, body extent -2.45,-1.5 2.45,1.5, height 0.94
DTM13-24P [mm] "DTM13-12P*-12P*-R008"
  round 1.8 hole 1.2: 1.1(-17.018,-1.956) 1.2(-21.209,-1.956) 1.3(-25.4,-1.956) 1.4(-29.591,-1.956) 1.5(-33.782,-1.956) 1.6(-37.973,-1.956) 1.7(-37.973,4.394) 1.8(-33.782,4.394) 1.9(-29.591,4.394) 1.10(-25.4,4.394) 1.11(-21.209,4.394) 1.12(-17.018,4.394) 2.1(17.018,4.394) 2.2(21.209,4.394) 2.3(25.4,4.394) 2.4(29.591,4.394) 2.5(33.782,4.394) 2.6(37.973,4.394) 2.7(37.973,-1.956) 2.8(33.782,-1.956) 2.9(29.591,-1.956) 2.10(25.4,-1.956) 2.11(21.209,-1.956) 2.12(17.018,-1.956)
  round 5 hole 3.2: S(0,0)
  body extent -54.16,-30.66 54.15,6.25, height 25.71
FP-C21-1498-DUAL-MFG [mm]
  rrect50% 0.45x1 smd paste+0 mask+0: 1(-1.905,-2.715) 2(-0.635,-2.715) 3(0.635,-2.715) 4(1.905,-2.715)
  round 0.025 smd paste-2539.97: 5(1.408,1.08) 6(-1.408,1.08)
  silkscreen extent -2.67,-2.92 -2.42,-2.67, body extent -2.67,-3.18 2.67,3.18, height 0.25
FP-DCK0005A-MFG [mm]
  rrect50% 1x0.4 smd paste-1000 mask+0: 1(-1.1,0.65) 2(-1.1,0) 3(-1.1,-0.65) 4(1.1,-0.65) 5(1.1,0.65)
  silkscreen extent -0.43,0.6 -0.33,0.7, body extent -1.65,-1.33 1.65,1.33, height 0.25
FP-DRR0012E-IPC_B [mm]
  rect 0.93x0.242 smd paste+0 mask+0: 1(-1.491,1.25)
  rrect100% 0.93x0.242 smd paste+0 mask+0: 2(-1.491,0.75) 3(-1.491,0.25) 4(-1.491,-0.25) 5(-1.491,-0.75) 6(-1.491,-1.25) 7(1.491,-1.25) 8(1.491,-0.75) 9(1.491,-0.25) 10(1.491,0.25) 11(1.491,0.75) 12(1.491,1.25)
  rect 1.4x2.6 smd paste-1000 mask+0: 13(0,0)
  silkscreen extent -2.39,1.15 -2.19,1.35, body extent -2.11,-1.75 2.11,1.75, height 0.25
FP-PG-TO252-5-MFG [mm]
  rect 0.8x2.2 smd paste+0 mask+0: 1(-2.28,-5.08) 2(-1.14,-5.08) 4(1.14,-5.08) 5(2.28,-5.08)
  rect 5.8x6.4 smd paste-1000 mask+0: 6(0,1.22)
  silkscreen extent -3.32,-6.93 3.32,3.11, body extent -3.42,-6.28 3.42,4.52, height 0.25
FP-PWP0016J-MFG [mm]
  rect 1.5x0.45 smd paste+0 mask+0: 1(-2.9,2.275)
  rrect22% 1.5x0.45 smd paste+0 mask+0: 2(-2.9,1.625) 3(-2.9,0.975) 4(-2.9,0.325) 5(-2.9,-0.325) 6(-2.9,-0.975) 7(-2.9,-1.625) 8(-2.9,-2.275) 9(2.9,-2.275) 10(2.9,-1.625) 11(2.9,-0.975) 12(2.9,-0.325) 13(2.9,0.325) 14(2.9,0.975) 15(2.9,1.625) 16(2.9,2.275)
  rect 3.4x5 smd paste-1000 mask-1000: 17(0,0)
  body extent -3.75,-2.8 3.75,2.8, height 0.25
JUMPER [mm]
  rect 0.65x0.51 smd paste-2.54 mask-2.54: 1(0,-0.45)
  rect 0.65x0.55 smd paste-2.54 mask-2.54: 2(0,0.55)
  Top region: -0.325,-0.041 0,0.284 0.325,-0.041 0.325,0.318 -0.325,0.317
  Top region: -0.325,-0.195 0.003,0.132 0.325,-0.195
"M5Stamp S3A-mfg" [mm]
  round 1.2 hole 0.85 unplated mask+0.05: 1(-7.62,11.43) 3(-7.62,8.89) 5(-7.62,6.35) 7(-7.62,3.81) 9(-7.62,1.27) 11(-7.62,-1.27) 13(-7.62,-3.81) 15(-7.62,-6.35) 17(-7.62,-8.89) 18(7.62,-8.89) 20(7.62,-6.35) 22(7.62,-3.81) 24(7.62,-1.27) 26(7.62,1.27) 28(7.62,3.81)
  round 0.85 hole 0.55 unplated mask+0.05: 2(-7.62,10.16) 4(-7.62,7.62) 6(-7.62,5.08) 8(-7.62,2.54) 10(-7.62,0) 12(-7.62,-2.54) 14(-7.62,-5.08) 16(-7.62,-7.62) 19(7.62,-7.62) 21(7.62,-5.08) 23(7.62,-2.54) 25(7.62,0) 27(7.62,2.54)
  body extent -9.1,-12.68 9.19,13.44, height 4.8
NXP-SOIC-8_L [mm] "SOIC, 8-Leads, Body 5x4mm, Pitch 1.27mm, IPC High Density"
  oval 1.25x0.55 smd: 1(-2.625,1.905) 2(-2.625,0.635) 3(-2.625,-0.635) 4(-2.625,-1.905) 5(2.625,-1.905) 6(2.625,-0.635) 7(2.625,0.635) 8(2.625,1.905)
  silkscreen extent -2.75,2.61 -2.5,2.85, body extent -3,-2.5 3,2.5, height 1.75
ONSC-SOT-323-3-Generic [mm] "SOT23, 3-Leads, Body 2x1.25mm, Pitch 0.65mm"
  rrect15% 0.9x0.7 smd paste-0.02 mask+0.05: 1(-0.95,0.65) 2(-0.95,-0.65) 3(0.95,0)
  silkscreen extent -0.25,0.85 -0.15,0.95, body extent -1.05,-1.07 1.05,1.07, height 1.1
SMD_0603_RES [mm] "SMD_0603_RES"
  rrect20% 0.75x0.9 smd: 1(-0.6,0) 2(0.6,0)
  body extent -0.8,-0.4 0.8,0.4, height 0.45
SMD_1206_RES [mm] "SMD_1206_RES"
  rrect20% 0.95x1.7 smd: 1(-1.4,0) 2(1.4,0)
  body extent -1.6,-0.8 1.6,0.8, height 0.6
SOT23-3-DIODES [mm] "Diodes Inc. AP02001 Pad Layout"
  rect 0.9x0.8 smd paste+0 mask+0: 1(-1,0.95)
  rrect25% 0.9x0.8 smd paste+0 mask+0: 2(-1,-0.95) 3(1,0)
  body extent -2.31,-1.95 2.31,1.95, height 0.25
TI-DGS0010A-VSSOP-10 [mm] "TI - DGS0010A - VSSOP-10 - 3x4.9x1mm"
  rrect33% 1.45x0.3 smd paste+0 mask+0.05: 1(-2.2,1) 2(-2.2,0.5) 3(-2.2,0) 4(-2.2,-0.5) 5(-2.2,-1) 6(2.2,-1) 7(2.2,-0.5) 8(2.2,0) 9(2.2,0.5) 10(2.2,1)
  silkscreen extent -2.17,1.45 -2.08,1.55, body extent -2.45,-1.55 2.45,1.55, height 1.1
TI-PW16_L [mm] "SOP, 16-Leads, Body 5x4.4mm, Pitch 0.65mm, IPC High Density"
  oval 1.4x0.35 smd: 1(-2.8,2.275) 2(-2.8,1.625) 3(-2.8,0.975) 4(-2.8,0.325) 5(-2.8,-0.325) 6(-2.8,-0.975) 7(-2.8,-1.625) 8(-2.8,-2.275) 9(2.8,-2.275) 10(2.8,-1.625) 11(2.8,-0.975) 12(2.8,-0.325) 13(2.8,0.325) 14(2.8,0.975) 15(2.8,1.625) 16(2.8,2.275)
  silkscreen extent -2.93,-2.55 1.7,3.12, body extent -2.25,-2.55 2.25,2.55, height 1.2
TI-SOT23-5_DBV0005A [mm] "TI - SOT23-5 DBV0005A 2.9 x 1.6 x 1 mm"
  rrect17% 1.1x0.6 smd mask+0.07: 1(-1.3,0.95) 2(-1.3,0) 3(-1.3,-0.95) 4(1.3,-0.95) 5(1.3,0.95)
  body extent -1.5,-1.53 1.5,1.53, height 1.1
"TSSOP - 14" [mm] "TSSOP - 1.2 mm max height"
  rrect17% 1.5x0.45 smd mask+0.07: 1(-2.9,1.95) 2(-2.9,1.3) 3(-2.9,0.65) 4(-2.9,0) 5(-2.9,-0.65) 6(-2.9,-1.3) 7(-2.9,-1.95) 8(2.9,-1.95) 9(2.9,-1.3) 10(2.9,-0.65) 11(2.9,0) 12(2.9,0.65) 13(2.9,1.3) 14(2.9,1.95)
  silkscreen extent -3.55,2.8 -3.3,3.05, body extent -3.28,-2.55 3.28,2.55, height 1.09
WCAP-CSGP_0603_L1.6W0.8H0.8_Reflow [mm] "Ceramic Capacitors, body 1.6x0.8mm"
  rect 0.8x0.8 smd: 1(-0.75,0) 2(0.75,0)
  body extent -0.8,-0.4 0.8,0.4, height 0.8
WPME-FDSM_SIP-3_L11.6W8H10.4 [mm] "Fixed Step Down Regulator Module, SIP-3, body 11.60x80mm"
  rrect50% 1.5x1.5 hole 1: 1(-2.54,-1.7)
  round 1.5 hole 1: 2(0,-1.7) 3(2.54,-1.7)
  body extent -5.8,-4 5.8,4, height 10.45
WSON10B-Toshiba [mm] "SON, 10-Leads, Body 3,00x3,00mm, Pitch 0,50mm, Thermal Pad 2,40x1,65mm, IPC Medium Density"
  rect 0.85x0.28 smd: 1(-1.475,1) 2(-1.475,0.5) 3(-1.475,0) 4(-1.475,-0.5) 5(-1.475,-1) 6(1.475,-1) 7(1.475,-0.5) 8(1.475,0) 9(1.475,0.5) 10(1.475,1)
  round 0.025 smd: EP(0,0)
  silkscreen extent -1.83,1.35 -1.73,1.45, body extent -1.52,-1.47 1.52,1.47, height 0.75